# Altium PCB I2C_MB.PcbDoc
Units mil, origin at the board's own origin, x right, y up, seen from the top; angles counter-clockwise.
Board outline 855 x 1000 mil, 2 copper layers (Top Layer, Bottom Layer); 8 components, 7 nets, 26 pads, 0 vias.
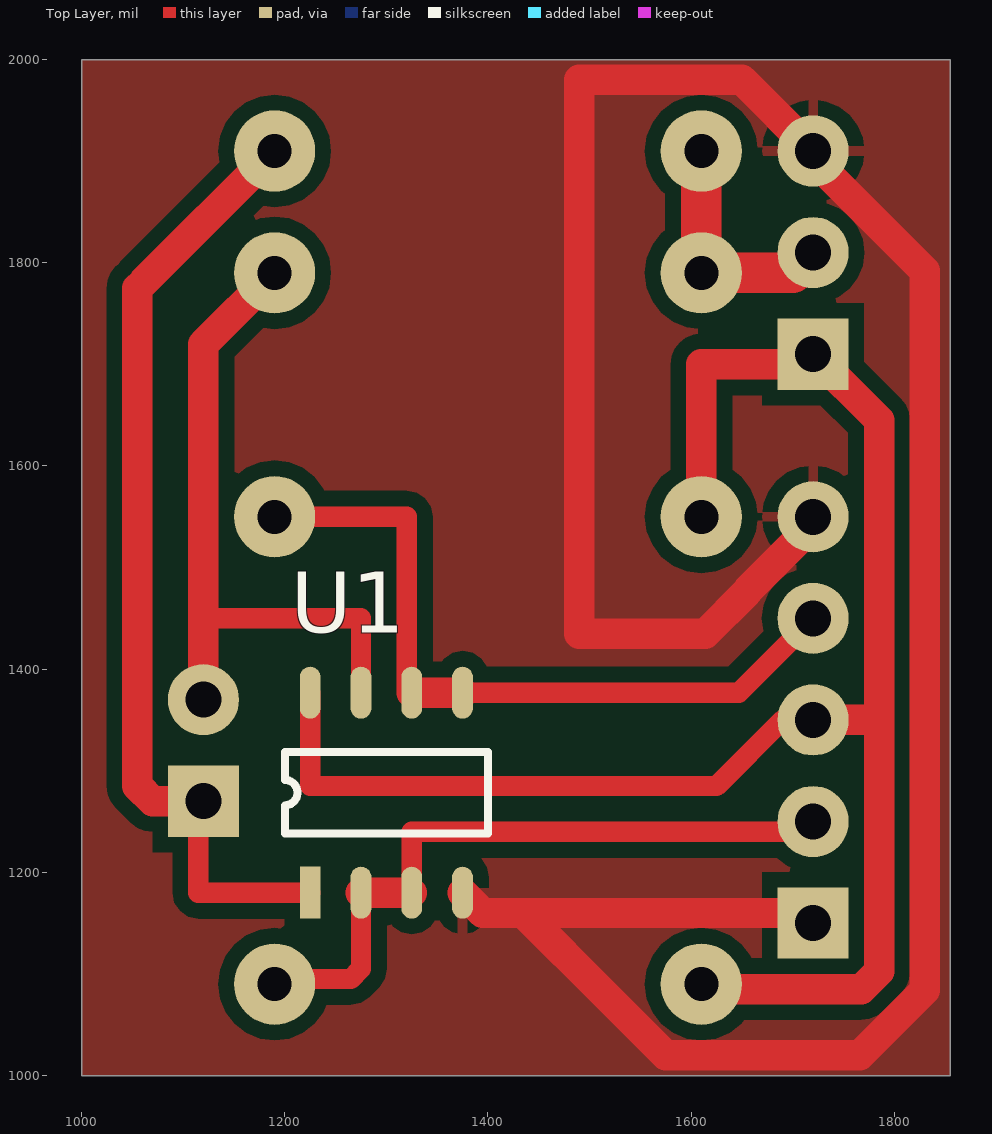
[diagram p0: Top Layer view]
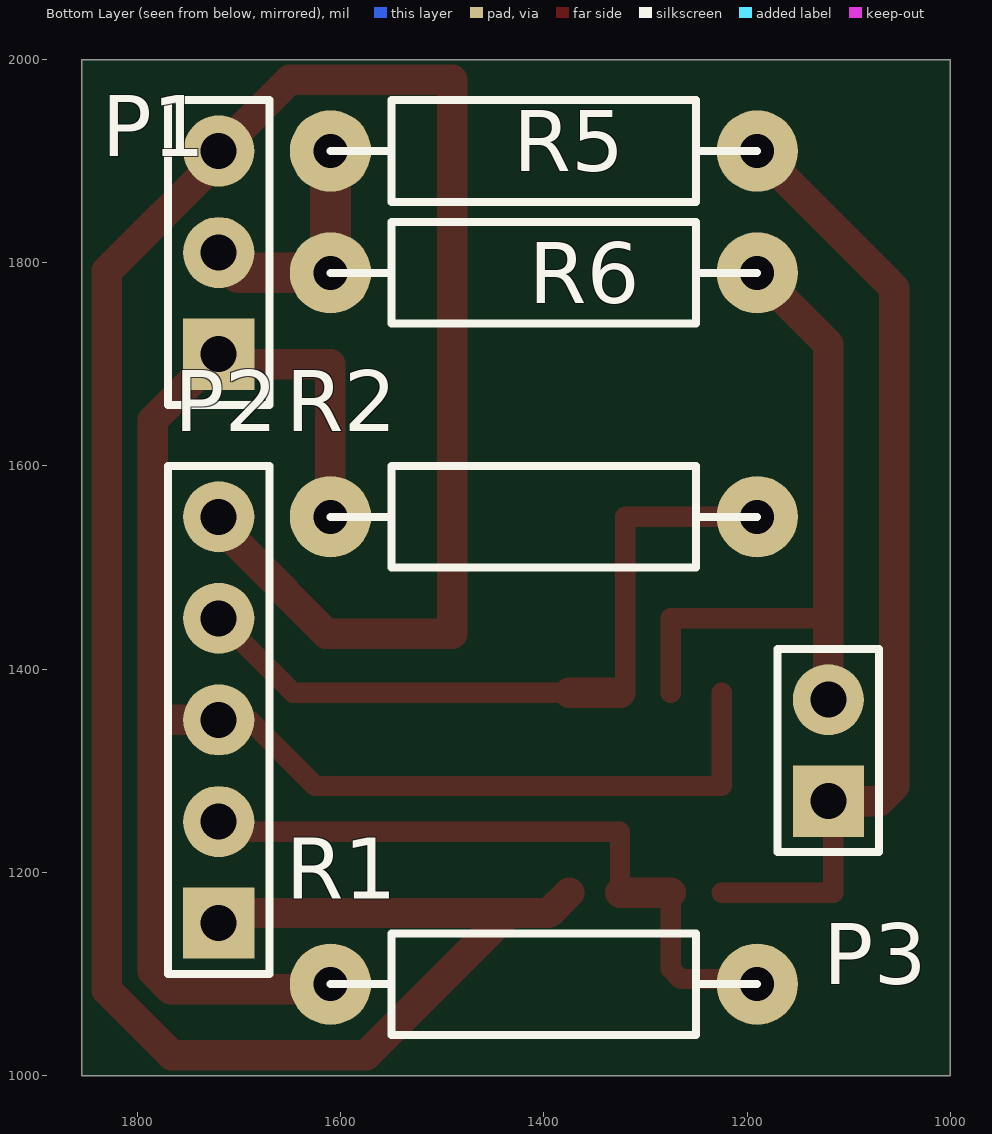
[diagram p1: Bottom Layer view, seen from below]

## Layer stack, top to bottom
Top Layer: signal copper 1.4
Dielectric: dielectric 12.6, FR-4, Dk 4.8
Bottom Layer: signal copper 1.4

## Board outline
1000,2000 1855,2000 1855,1000 1000,1000

## Design rules (kind name [scope] priority, off if disabled: settings)
Clearance [All] p1: gap=15
PolygonConnect [All] p1: connectstyle=Relief reliefconductorwidth=10 reliefentries=4 polygonreliefangle="90 Angle"
RoomDefinition I2C_MB [InComponentClass('I2C_MB')] p1: confinementstyle=ConfineIn formatcopy=TRUE lockcomponents=FALSE outline 1000,1000 1855,1000 1855,2000 1000,2000
RoutingVias [All] p1: holewidth=28 width=50 viastyle="Through Hole" minholewidth=28 minwidth=50 maxholewidth=28 maxwidth=50
SilkscreenOverComponentPads [All] p1: minsilkscreentomaskgap=10
SolderMaskExpansion [All] p1: expansion=4
Width [All] p1: maxlimit=40 minlimit=20 preferedwidth=40
27 further rules are at their usual default settings.

## Components (designator, comment, footprint, x,y, rotation, side; value= is the part's Value field where it differs from the comment)
P1 "POWER" HDR1X3 1720,1710 r90 bottom
P2 "Header 5" HDR1X5 1720,1150 r90 bottom
P3 "TWI1" HDR1X2 1120,1270 r90 bottom
R1 "Res Semi" AXIAL-0.5 1400,1090 r0 bottom
R2 "Res Semi" AXIAL-0.5 1400,1550 r0 bottom
R5 "Res Semi" AXIAL-0.5 1400,1910 r0 bottom
R6 "Res Semi" AXIAL-0.5 1400,1790 r0 bottom
U1 "p82b96" SOIC8 1225,1180 r90 top

## Footprints (in the part's own frame and the unit in brackets; to place one, negate y for a bottom-side part, rotate by r counter-clockwise, add the part's x,y. Pads: shape width x height; smd on the part's side, far side on the other; paste and mask are expansions set on the pad)
AXIAL-0.5 [mil] "Axial Device, Thru-Hole; 2 Leads; 0.5 in Pin Spacing"
  round 80 hole 33.46: 1(-210,0) 2(210,0)
  silkscreen extent -210,-50 210,50
HDR1X2 [mil] "Connector; Header; 2 Position"
  rect 70x70 hole 35.43: 1(0,0)
  round 70 hole 35.43: 2(100,0)
  silkscreen extent -50,-50 150,50
HDR1X3 [mil] "Connector; Header; 3 Position"
  rect 70x70 hole 35.43: 1(0,0)
  round 70 hole 35.43: 2(100,0) 3(200,0)
  silkscreen extent -50,-50 250,50
HDR1X5 [mil] "Connector; Header; 5 Position"
  rect 70x70 hole 35.43: 1(0,0)
  round 70 hole 35.43: 2(100,0) 3(200,0) 4(300,0) 5(400,0)
  silkscreen extent -50,-50 450,50
SOIC8 [mm]
  rect 1.3x0.52 smd: 1(0,0)
  oval 1.3x0.52 smd: 2(0,-1.27) 3(0,-2.54) 4(0,-3.81) 5(5,-3.81) 6(5,-2.54) 7(5,-1.27) 8(5,0)
  silkscreen extent 1.48,-4.44 3.52,0.64

## Part data
P1: library part "Header 3", "Header, 3-Pin"
P2: "Header, 5-Pin"
P3: library part "Header 2", "Header, 2-Pin"
R1 R2 R5 R6: "Semiconductor Resistor"

## Nets (pads, with @x,y where several pads share a name; then routed paths per layer and width w, separated by ;. In a path a pad name is that pad's centre, name@x,y a point inside that pad or via, vN(x,y) a via of type N, cw(c..) or ccw(c..) an arc to the next point about the centre after c; other vN are vias at no path point)
12V: P1.1 P2.3 R1.2 R2.2 U1.8 | length 1781.6
  Top Layer w20: U1.8 1225,1285 1625,1285 1690,1350 P2.3
  Top Layer w30: R1.2 1615,1085 1767.43,1085 1785,1102.57 1785,1350 ; R2.2@1610,1530 1610,1700 1710,1700 P1.1 1785,1645 1785,1350 ; P2.3 1785,1350
GND: P1.3 P2.1 P2.5 U1.4 | length 2789.3
  Top Layer w30: U1.4 1395,1160 1435,1160 ; P2.1 1710,1160 1435,1160 ; P2.5@1720,1541.92 1655,1476.92 1655,1476.01 1613.99,1435 1490,1435 1490,1980 1650,1980 P1.3 1720,1901.92 1830,1791.92 1830,1083.93 1766.07,1020 1575,1020 1517.5,1077.5 1435,1160 ; P2.5@1720,1548.08 P2.5
SCL1: P3.1 R5.1 U1.1 | length 940.1
  Top Layer w20: P3.1@1115,1265 1115,1180 U1.1
  Top Layer w30: 1055,1775 1055,1285 1070,1270 P3.1 ; 1060,1780 R5.1
SCL1_BUS: P2.2 R1.1 U1.2 U1.3 | length 661.2
  Top Layer w20: R1.1 1195,1095 1265,1095 1275,1105 U1.2 ; U1.3 1325,1240 P2.2@1710,1240
  Top Layer w30: U1.2 U1.3
SDA1: P3.2 R6.1 U1.7 | length 677.1
  Top Layer w20: 1120,1450 1275,1450 U1.7
  Top Layer w30: P3.2 1120,1450 1120,1720 R6.1
SDA1_BUS: P2.4 R2.1 U1.5 U1.6 | length 731.7
  Top Layer w20: R2.1@1190,1530 1210,1550 1320,1550 U1.6@1320,1381.85 ; U1.5 1646.85,1376.85 P2.4
  Top Layer w30: U1.6 U1.5
VCC: P1.2 R5.2 R6.2 | length 210
  Top Layer w40: R5.2 R6.2 P1.2@1700,1790

## Polygon pours and split planes (outlines as drawn)
GND on Top Layer "Top Layer-No Net" (solid, remove dead copper): 1000,2000 1855,2000 1855,1000 1000,1000